# Altium PCB som_fpga.PcbDoc (part 1 of 2)
Units mm, origin at the board's own origin, x right, y up, seen from the top; angles counter-clockwise.
Board outline 60 x 50 mm, 4 copper layers (F.Cu, In1.Cu, In2.Cu, B.Cu); 88 components, 111 nets, 794 pads, 250 vias.
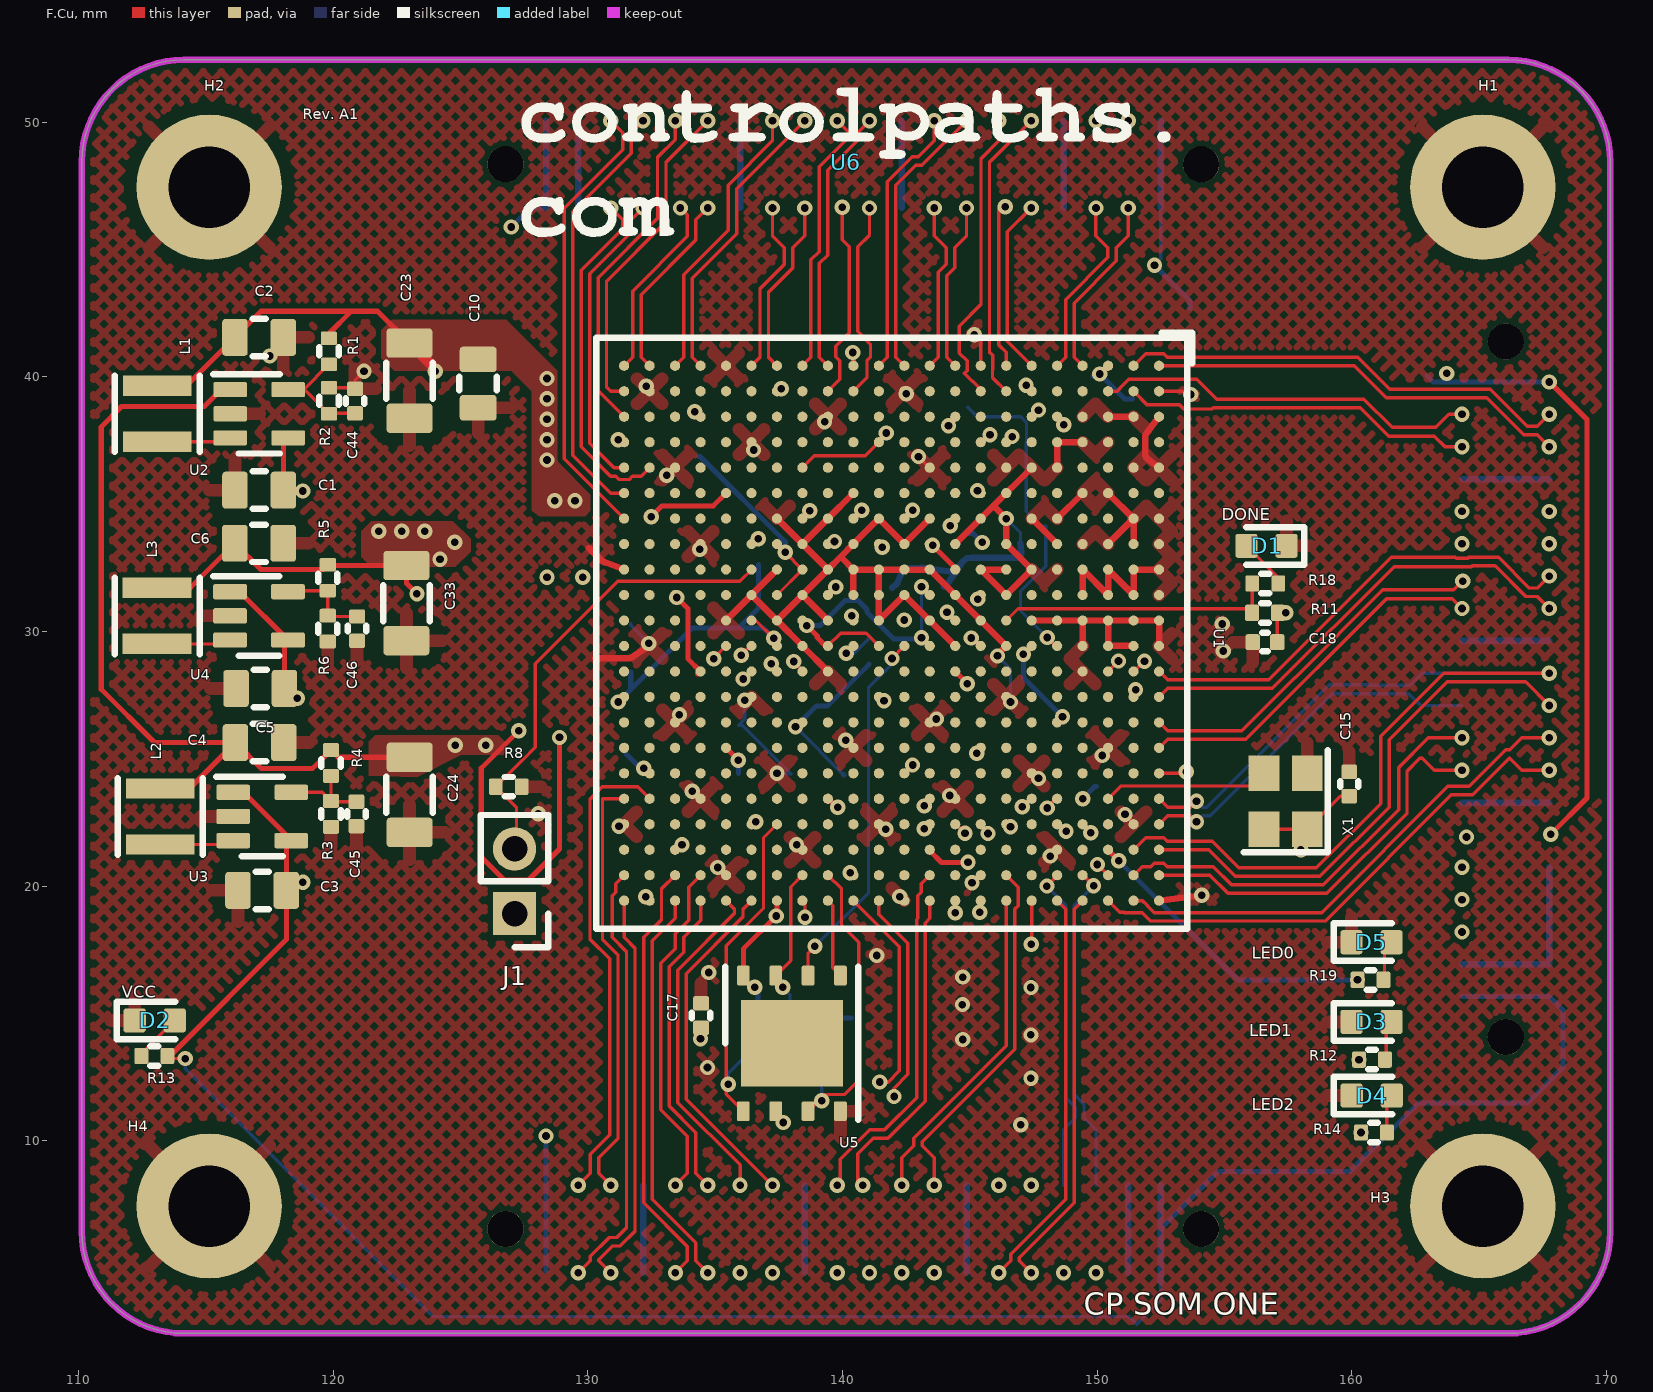
[diagram p0: F.Cu view]
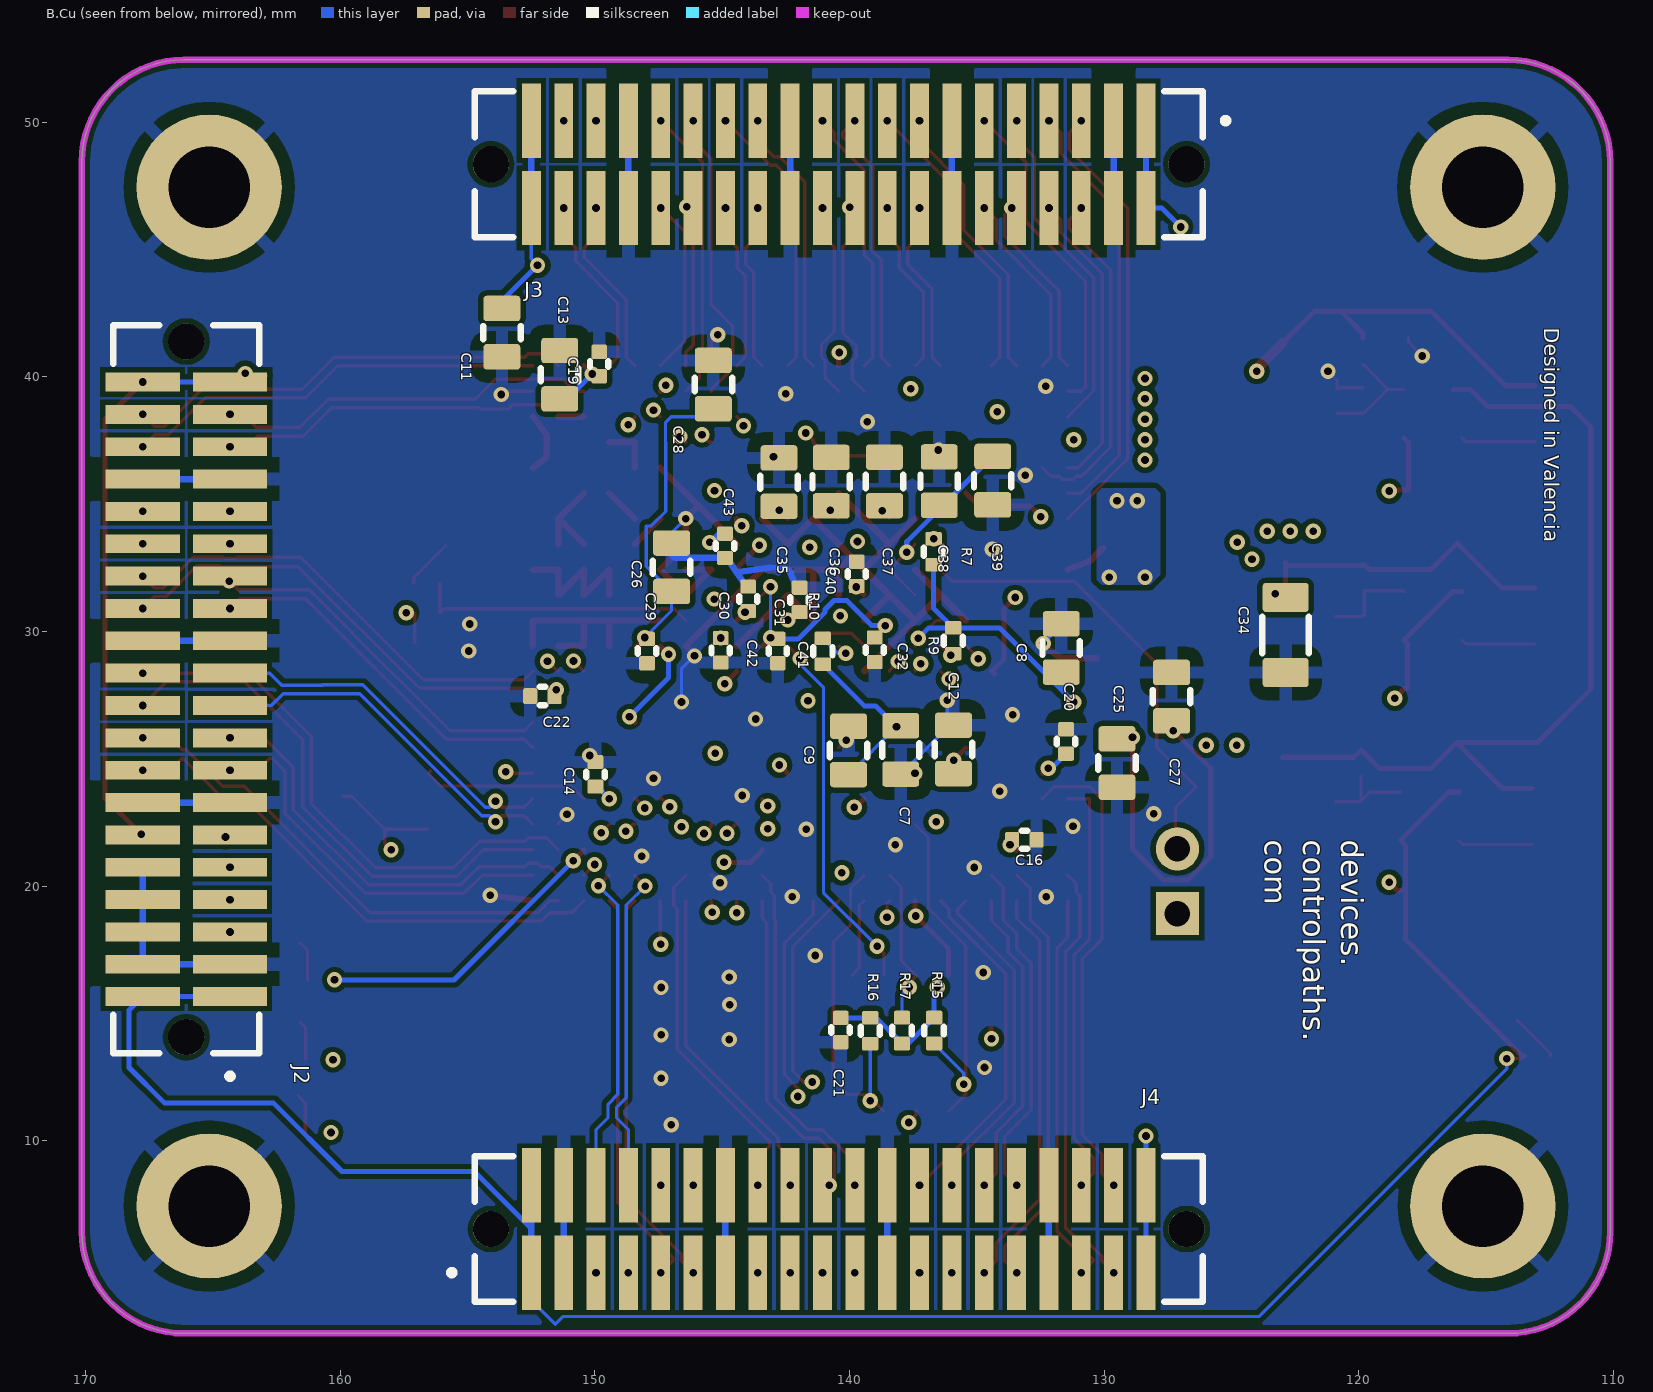
[diagram p1: B.Cu view, seen from below]
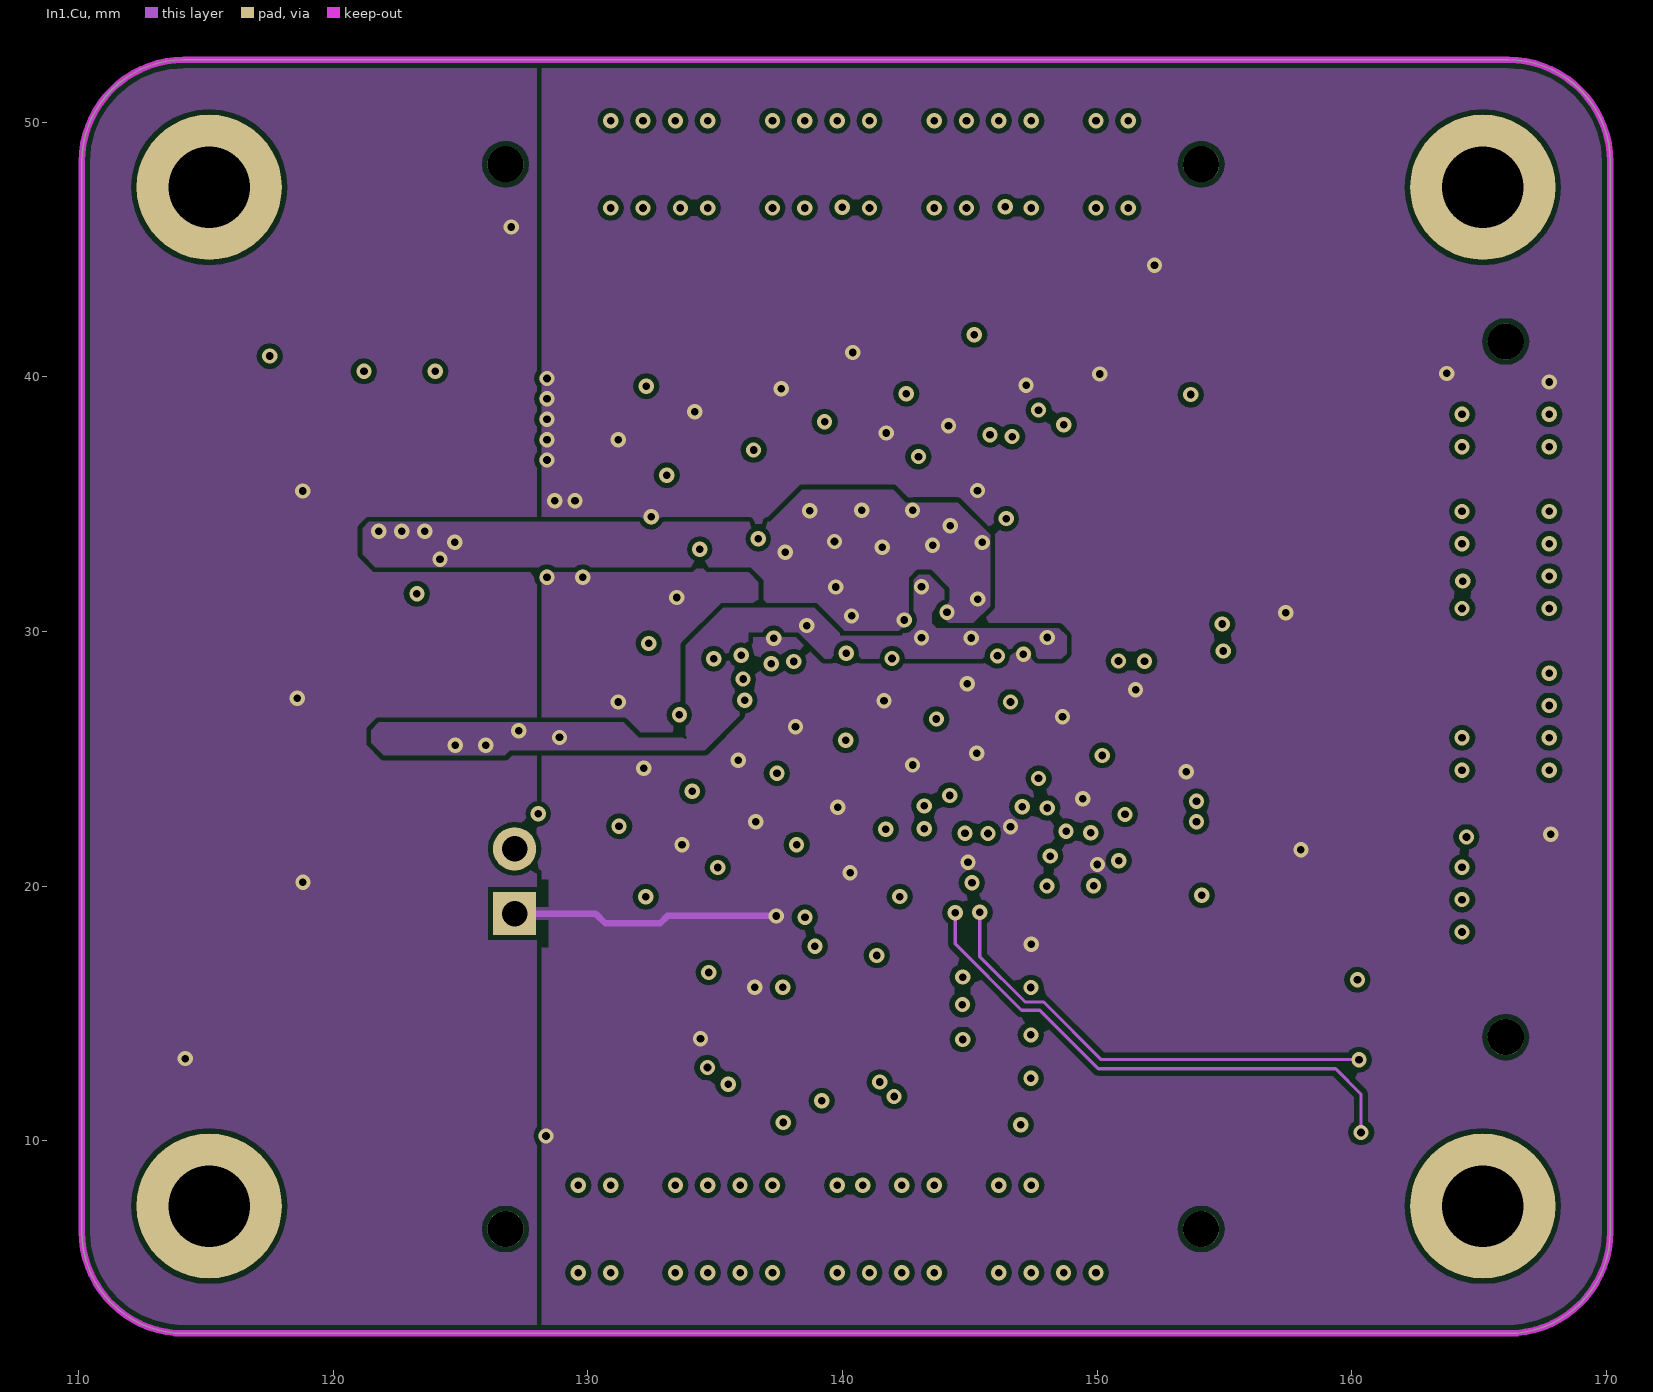
[diagram p2: In1.Cu]
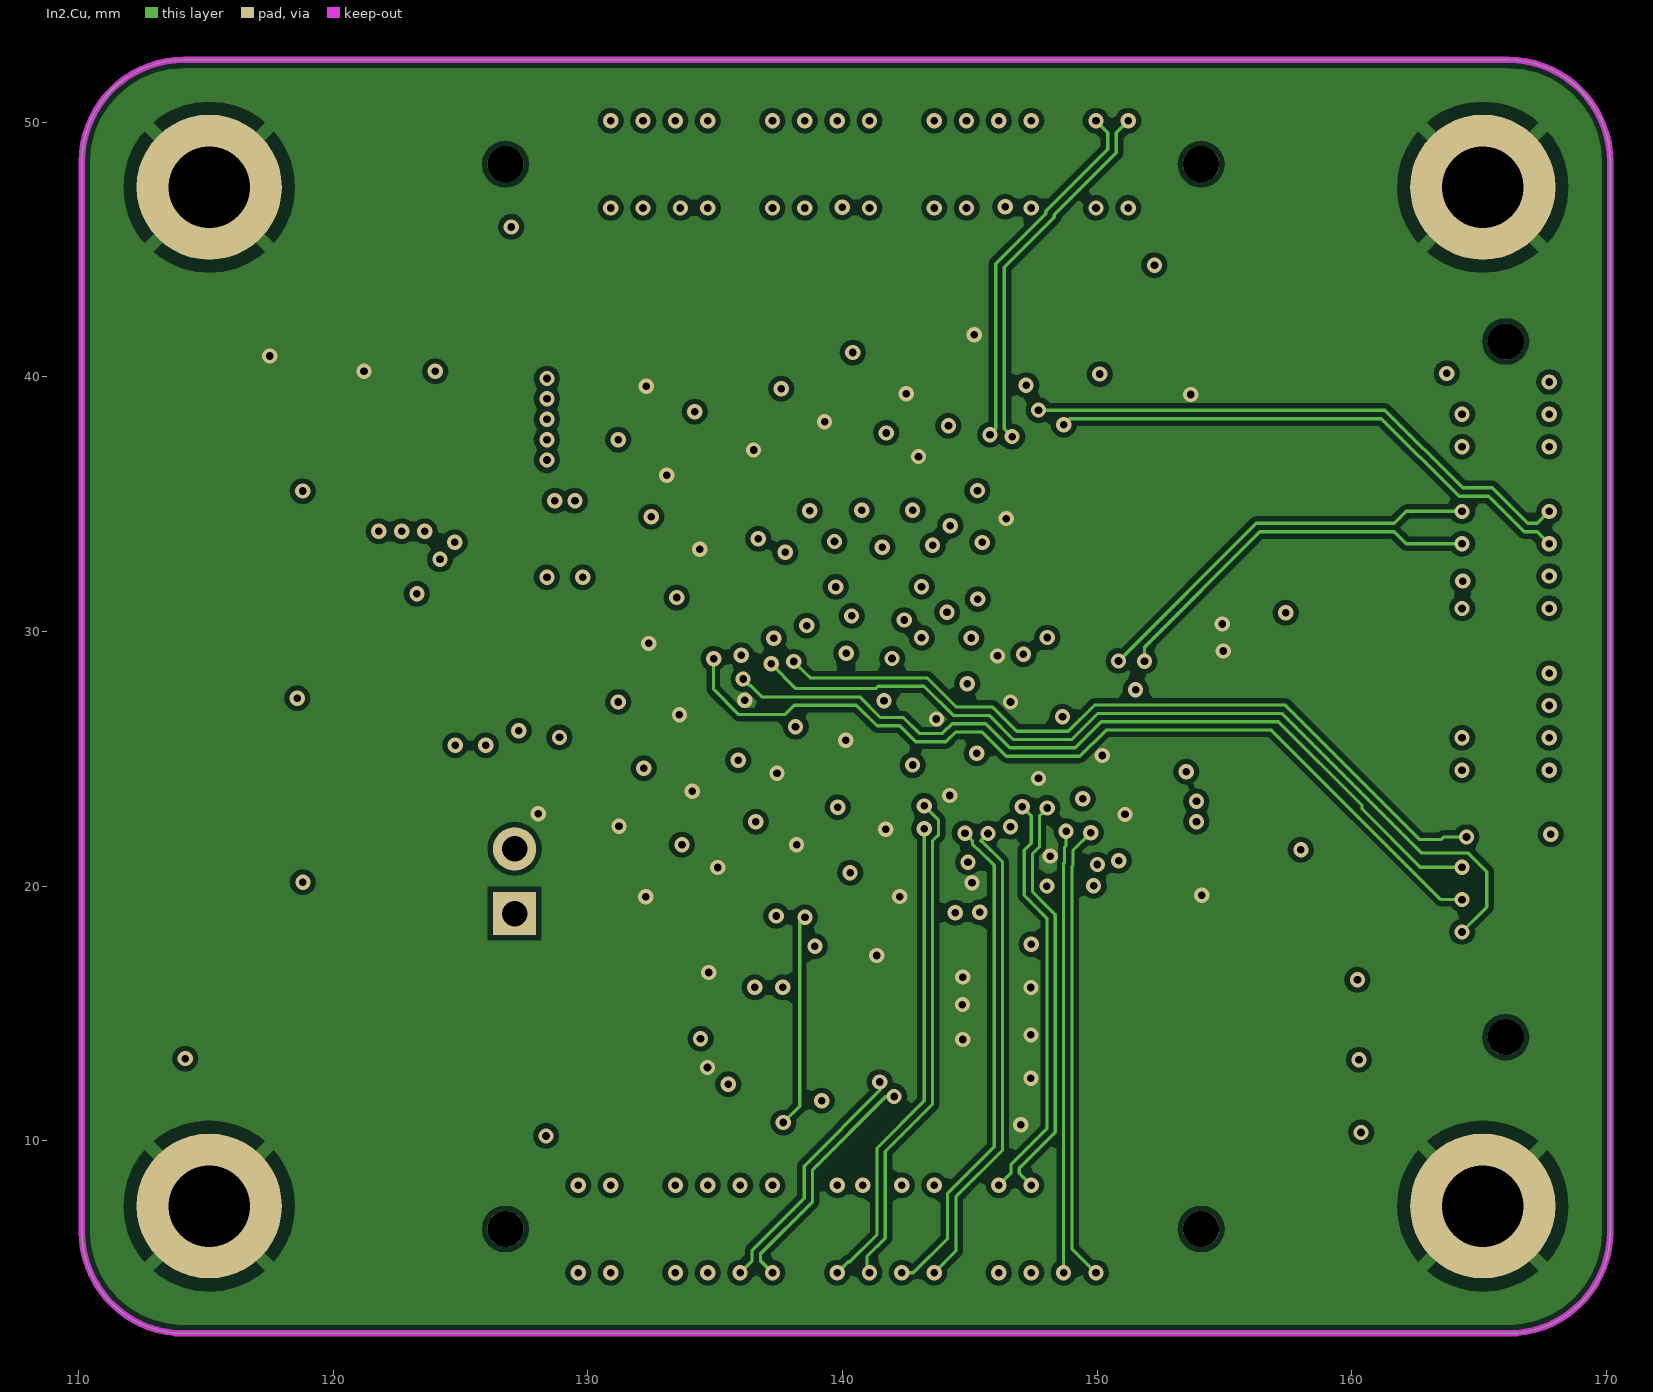
[diagram p3: In2.Cu]

## Layer stack, top to bottom
F.Mask: solder mask 0.0102, Solder Resist, Dk 3.5
F.Cu: signal copper 0.0356
Dielectric 1: dielectric 0.32, FR-4, Dk 4.8
In1.Cu: signal copper 0.0356
Dielectric2: dielectric 0.32, FR-4, Dk 4.8
In2.Cu: signal copper 0.0356
Dielectric3: dielectric 0.32, FR-4, Dk 4.8
B.Cu: signal copper 0.0356
B.Mask: solder mask 0.0102, Solder Resist, Dk 3.5

## Board outline
170.14,48.44 170.14,6.44 cw(c166.14,6.44) 166.14,2.44 114.14,2.44 cw(c114.14,6.44) 110.14,6.44 110.14,48.44 cw(c114.14,48.44) 166.14,52.44 cw(c166.14,48.44) 170.14,48.44

## Design rules (kind name [scope] priority, off if disabled: settings)
Clearance "Clearence 0.3_Polygon" [InNamedPolygon('In1.Cu-+3V3-1')] p1: gap=0.3 ignorepadtopadclearanceinfootprint=FALSE
Clearance "Clearence 0.2_Polygon" [InNamedPolygon('F.Cu-+1V8') OR InNamedPolygon('F.Cu-+3V3') OR InNamedPolygon('F.Cu-+1V0') OR InNamedPolygon('F.Cu-GND') OR InNamedPolygon('In1.Cu-+3V3') OR InNamedPolygon('In1.Cu-+1V8') OR InNamedPolygon('In1.Cu-+5V') OR InNamedPolygon('In1.Cu-+1V0') OR InNamedPolygon('In2.Cu-GND') OR InNamedPolygon('B.Cu-+3V3') OR InNamedPolygon('B.Cu-GND')] p2: gap=0.2 ignorepadtopadclearanceinfootprint=FALSE
HoleSize [All] p1: absolutevalues=TRUE maxlimit=3.6 minlimit=0.025 maxpercent=80.000 minpercent=20.000
MinimumSolderMaskSliver [All] p1: minsoldermaskwidth=0
PolygonConnect Polygon_B.Cu-GND_ConnectDirect [IsNamedPolygon('B.Cu-GND') vs IsVia] p1: connectstyle=Direct reliefconductorwidth=0.254 reliefentries=4 polygonreliefangle="90 Angle" airgapwidth=0.254
PolygonConnect Polygon_B.Cu-GND_ConnectRelief45 [IsNamedPolygon('B.Cu-GND') vs (IsThruPin or IsSMTPin) and (PadShape_AllLayers = 'Round')] p2: connectstyle=Relief reliefconductorwidth=0.5 reliefentries=4 polygonreliefangle="45 Angle" airgapwidth=0.5
PolygonConnect Polygon_B.Cu-GND_ConnectRelief90 [IsNamedPolygon('B.Cu-GND') vs (IsThruPin or IsSMTPin) and (PadShape_AllLayers <> 'Round')] p3: connectstyle=Relief reliefconductorwidth=0.5 reliefentries=4 polygonreliefangle="90 Angle" airgapwidth=0.5
PolygonConnect Polygon_B.Cu-+3V3_ConnectDirect [IsNamedPolygon('B.Cu-+3V3') vs IsVia] p4: connectstyle=Direct reliefconductorwidth=0.254 reliefentries=4 polygonreliefangle="90 Angle" airgapwidth=0.254
PolygonConnect Polygon_B.Cu-+3V3_ConnectRelief45 [IsNamedPolygon('B.Cu-+3V3') vs (IsThruPin or IsSMTPin) and (PadShape_AllLayers = 'Round')] p5: connectstyle=Relief reliefconductorwidth=0.5 reliefentries=4 polygonreliefangle="45 Angle" airgapwidth=0.5
PolygonConnect Polygon_B.Cu-+3V3_ConnectRelief90 [IsNamedPolygon('B.Cu-+3V3') vs (IsThruPin or IsSMTPin) and (PadShape_AllLayers <> 'Round')] p6: connectstyle=Relief reliefconductorwidth=0.5 reliefentries=4 polygonreliefangle="90 Angle" airgapwidth=0.5
PolygonConnect Polygon_In2.Cu-GND_ConnectDirect [IsNamedPolygon('In2.Cu-GND') vs IsVia] p7: connectstyle=Direct reliefconductorwidth=0.254 reliefentries=4 polygonreliefangle="90 Angle" airgapwidth=0.254
PolygonConnect Polygon_In2.Cu-GND_ConnectRelief45 [IsNamedPolygon('In2.Cu-GND') vs (IsThruPin or IsSMTPin) and (PadShape_AllLayers = 'Round')] p8: connectstyle=Relief reliefconductorwidth=0.5 reliefentries=4 polygonreliefangle="45 Angle" airgapwidth=0.5
PolygonConnect Polygon_In2.Cu-GND_ConnectRelief90 [IsNamedPolygon('In2.Cu-GND') vs (IsThruPin or IsSMTPin) and (PadShape_AllLayers <> 'Round')] p9: connectstyle=Relief reliefconductorwidth=0.5 reliefentries=4 polygonreliefangle="90 Angle" airgapwidth=0.5
PolygonConnect Polygon_In1.Cu-+1V0_ConnectDirect [IsNamedPolygon('In1.Cu-+1V0') vs IsVia] p10: connectstyle=Direct reliefconductorwidth=0.254 reliefentries=4 polygonreliefangle="90 Angle" airgapwidth=0.254
PolygonConnect Polygon_In1.Cu-+1V0_ConnectRelief45 [IsNamedPolygon('In1.Cu-+1V0') vs (IsThruPin or IsSMTPin) and (PadShape_AllLayers = 'Round')] p11: connectstyle=Relief reliefconductorwidth=0.5 reliefentries=4 polygonreliefangle="45 Angle" airgapwidth=0.5
PolygonConnect Polygon_In1.Cu-+1V0_ConnectRelief90 [IsNamedPolygon('In1.Cu-+1V0') vs (IsThruPin or IsSMTPin) and (PadShape_AllLayers <> 'Round')] p12: connectstyle=Relief reliefconductorwidth=0.5 reliefentries=4 polygonreliefangle="90 Angle" airgapwidth=0.5
PolygonConnect Polygon_In1.Cu-+5V_ConnectDirect [IsNamedPolygon('In1.Cu-+5V') vs IsVia] p13: connectstyle=Direct reliefconductorwidth=0.254 reliefentries=4 polygonreliefangle="90 Angle" airgapwidth=0.254
PolygonConnect Polygon_In1.Cu-+5V_ConnectRelief45 [IsNamedPolygon('In1.Cu-+5V') vs (IsThruPin or IsSMTPin) and (PadShape_AllLayers = 'Round')] p14: connectstyle=Relief reliefconductorwidth=0.5 reliefentries=4 polygonreliefangle="45 Angle" airgapwidth=0.5
PolygonConnect Polygon_In1.Cu-+5V_ConnectRelief90 [IsNamedPolygon('In1.Cu-+5V') vs (IsThruPin or IsSMTPin) and (PadShape_AllLayers <> 'Round')] p15: connectstyle=Relief reliefconductorwidth=0.5 reliefentries=4 polygonreliefangle="90 Angle" airgapwidth=0.5
PolygonConnect Polygon_In1.Cu-+3V3-1_ConnectDirect [IsNamedPolygon('In1.Cu-+3V3-1') vs IsVia] p16: connectstyle=Direct reliefconductorwidth=0.254 reliefentries=4 polygonreliefangle="90 Angle" airgapwidth=0.254
PolygonConnect Polygon_In1.Cu-+3V3-1_ConnectRelief45 [IsNamedPolygon('In1.Cu-+3V3-1') vs (IsThruPin or IsSMTPin) and (PadShape_AllLayers = 'Round')] p17: connectstyle=Relief reliefconductorwidth=0.5 reliefentries=4 polygonreliefangle="45 Angle" airgapwidth=0.5
PolygonConnect Polygon_In1.Cu-+3V3-1_ConnectRelief90 [IsNamedPolygon('In1.Cu-+3V3-1') vs (IsThruPin or IsSMTPin) and (PadShape_AllLayers <> 'Round')] p18: connectstyle=Relief reliefconductorwidth=0.5 reliefentries=4 polygonreliefangle="90 Angle" airgapwidth=0.5
PolygonConnect Polygon_In1.Cu-+1V8_ConnectDirect [IsNamedPolygon('In1.Cu-+1V8') vs IsVia] p19: connectstyle=Direct reliefconductorwidth=0.254 reliefentries=4 polygonreliefangle="90 Angle" airgapwidth=0.254
PolygonConnect Polygon_In1.Cu-+1V8_ConnectRelief45 [IsNamedPolygon('In1.Cu-+1V8') vs (IsThruPin or IsSMTPin) and (PadShape_AllLayers = 'Round')] p20: connectstyle=Relief reliefconductorwidth=0.5 reliefentries=4 polygonreliefangle="45 Angle" airgapwidth=0.5
PolygonConnect Polygon_In1.Cu-+1V8_ConnectRelief90 [IsNamedPolygon('In1.Cu-+1V8') vs (IsThruPin or IsSMTPin) and (PadShape_AllLayers <> 'Round')] p21: connectstyle=Relief reliefconductorwidth=0.5 reliefentries=4 polygonreliefangle="90 Angle" airgapwidth=0.5
PolygonConnect Polygon_In1.Cu-+3V3_ConnectDirect [IsNamedPolygon('In1.Cu-+3V3') vs IsVia] p22: connectstyle=Direct reliefconductorwidth=0.254 reliefentries=4 polygonreliefangle="90 Angle" airgapwidth=0.254
PolygonConnect Polygon_In1.Cu-+3V3_ConnectRelief45 [IsNamedPolygon('In1.Cu-+3V3') vs (IsThruPin or IsSMTPin) and (PadShape_AllLayers = 'Round')] p23: connectstyle=Relief reliefconductorwidth=0.5 reliefentries=4 polygonreliefangle="45 Angle" airgapwidth=0.5
PolygonConnect Polygon_In1.Cu-+3V3_ConnectRelief90 [IsNamedPolygon('In1.Cu-+3V3') vs (IsThruPin or IsSMTPin) and (PadShape_AllLayers <> 'Round')] p24: connectstyle=Relief reliefconductorwidth=0.5 reliefentries=4 polygonreliefangle="90 Angle" airgapwidth=0.5
PolygonConnect Polygon_F.Cu-GND_ConnectDirect [IsNamedPolygon('F.Cu-GND') vs IsVia] p25: connectstyle=Direct reliefconductorwidth=0.254 reliefentries=4 polygonreliefangle="90 Angle" airgapwidth=0.254
PolygonConnect Polygon_F.Cu-GND_ConnectRelief45 [IsNamedPolygon('F.Cu-GND') vs (IsThruPin or IsSMTPin) and (PadShape_AllLayers = 'Round')] p26: connectstyle=Relief reliefconductorwidth=0.5 reliefentries=4 polygonreliefangle="45 Angle" airgapwidth=0.5
PolygonConnect Polygon_F.Cu-GND_ConnectRelief90 [IsNamedPolygon('F.Cu-GND') vs (IsThruPin or IsSMTPin) and (PadShape_AllLayers <> 'Round')] p27: connectstyle=Relief reliefconductorwidth=0.5 reliefentries=4 polygonreliefangle="90 Angle" airgapwidth=0.5
PolygonConnect Polygon_F.Cu-+1V0_ConnectDirect [IsNamedPolygon('F.Cu-+1V0') vs IsVia] p28: connectstyle=Direct reliefconductorwidth=0.254 reliefentries=4 polygonreliefangle="90 Angle" airgapwidth=0.254
PolygonConnect Polygon_F.Cu-+1V0_ConnectRelief45 [IsNamedPolygon('F.Cu-+1V0') vs (IsThruPin or IsSMTPin) and (PadShape_AllLayers = 'Round')] p29: connectstyle=Relief reliefconductorwidth=0.5 reliefentries=4 polygonreliefangle="45 Angle" airgapwidth=0.5
PolygonConnect Polygon_F.Cu-+1V0_ConnectRelief90 [IsNamedPolygon('F.Cu-+1V0') vs (IsThruPin or IsSMTPin) and (PadShape_AllLayers <> 'Round')] p30: connectstyle=Relief reliefconductorwidth=0.5 reliefentries=4 polygonreliefangle="90 Angle" airgapwidth=0.5
PolygonConnect Polygon_F.Cu-+3V3_ConnectDirect [IsNamedPolygon('F.Cu-+3V3') vs IsVia] p31: connectstyle=Direct reliefconductorwidth=0.254 reliefentries=4 polygonreliefangle="90 Angle" airgapwidth=0.254
PolygonConnect Polygon_F.Cu-+3V3_ConnectRelief45 [IsNamedPolygon('F.Cu-+3V3') vs (IsThruPin or IsSMTPin) and (PadShape_AllLayers = 'Round')] p32: connectstyle=Relief reliefconductorwidth=0.5 reliefentries=4 polygonreliefangle="45 Angle" airgapwidth=0.5
PolygonConnect Polygon_F.Cu-+3V3_ConnectRelief90 [IsNamedPolygon('F.Cu-+3V3') vs (IsThruPin or IsSMTPin) and (PadShape_AllLayers <> 'Round')] p33: connectstyle=Relief reliefconductorwidth=0.5 reliefentries=4 polygonreliefangle="90 Angle" airgapwidth=0.5
PolygonConnect Polygon_F.Cu-+1V8_ConnectDirect [IsNamedPolygon('F.Cu-+1V8') vs IsVia] p34: connectstyle=Direct reliefconductorwidth=0.254 reliefentries=4 polygonreliefangle="90 Angle" airgapwidth=0.254
PolygonConnect Polygon_F.Cu-+1V8_ConnectRelief45 [IsNamedPolygon('F.Cu-+1V8') vs (IsThruPin or IsSMTPin) and (PadShape_AllLayers = 'Round')] p35: connectstyle=Relief reliefconductorwidth=0.5 reliefentries=4 polygonreliefangle="45 Angle" airgapwidth=0.5
PolygonConnect Polygon_F.Cu-+1V8_ConnectRelief90 [IsNamedPolygon('F.Cu-+1V8') vs (IsThruPin or IsSMTPin) and (PadShape_AllLayers <> 'Round')] p36: connectstyle=Relief reliefconductorwidth=0.5 reliefentries=4 polygonreliefangle="90 Angle" airgapwidth=0.5
RoutingVias [All] p1: holewidth=0.711 width=1.27 viastyle="Through Hole" minholewidth=0.711 minwidth=1.27 maxholewidth=0.711 maxwidth=1.27
SilkToSilkClearance [All] p1: silktosilkclearance=0
SilkToSolderMaskClearance [IsPad] p1: minsilkscreentomaskgap=0 clearancetoexposedcopper=TRUE
SolderMaskExpansion [All] p1: expansion=0.102 istentingtop=FALSE
SupplyNets "Schematic Supply Nets_4" [InNet('GND')] p1: voltage=0.000
SupplyNets "Schematic Supply Nets_3" [InNet('+5V')] p2: voltage=0.000
SupplyNets "Schematic Supply Nets_2" [InNet('+3V3')] p3: voltage=0.000
SupplyNets "Schematic Supply Nets_1" [InNet('+1V8')] p4: voltage=0.000
SupplyNets "Schematic Supply Nets" [InNet('+1V0')] p5: voltage=0.000
Width [All] p1: maxlimit=2.54 minlimit=0.102 preferedwidth=0.254
26 further rules are at their usual default settings.

## Classes and differential pairs
component class supply: C1 C2 C3 C4 C5 C6 C7 C8 C9 C10 C11 C12 C13 C14 C15 C16 C17 C18 C19 C20 C21 C22 C23 C24 C25 C26 C27 C28 C29 C30 C31 C32 C33 C34 C35 C36 C37 C38 C39 C40 C41 C42 C43 C44 C45 C46 D2 L1 L2 L3 R1 R2 R3 R4 R5 R6 R13 U2 U3 U4
component class som_fpga: H1 H2 H3 H4
component class FPGA_bank15_16: X1
component class FPGA_bank13_14: R15 R16 R17 U1 U5
component class FPGA_bank0_vss: D1 J1 R7 R8 R9 R10 R11 R18
component class connectors: D3 D4 D5 J2 J3 J4 R12 R14 R19

## Components (designator, comment, footprint, x,y, rotation, side; value= is the part's Value field where it differs from the comment)
C1 "4u7" C_0805_2012Metric#1 117.102,35.546 r180 top
C2 "10u" C_0805_2012Metric#1 117.102,41.546 r0 top
C3 "4u7" C_0805_2012Metric#1 117.219,19.836 r180 top
C4 "10u" C_0805_2012Metric#1 117.119,25.636 r0 top
C5 "4u7" C_0805_2012Metric#1 117.144,27.761 r180 top
C6 "10u" C_0805_2012Metric#1 117.094,33.461 r0 top
C7 "4u7" C_0805_2012Metric#2 137.99,25.35 r90 bottom
C8 "4u7" C_0805_2012Metric#2 131.69,29.35 r270 bottom
C9 "4u7" C_0805_2012Metric#2 140.04,25.33 r270 bottom
C10 "4u7" C_0805_2012Metric#1 125.7,39.73 r270 top
C11 "4u7" C_0805_2012Metric#2 153.65,41.73 r90 bottom
C12 "4u7" C_0805_2012Metric#2 135.92,25.37 r270 bottom
C13 "4u7" C_0805_2012Metric#2 151.38,40.08 r270 bottom
C14 "0.47u" C_0402_1005Metric#1 149.98,24.39 r270 bottom
C15 "0.47u" C_0402_1005Metric#2 159.9,24.01 r90 top
C16 "0.47u" C_0402_1005Metric#1 133.14,21.82 r0 bottom
C17 "0.47u" C_0402_1005Metric#2 134.45,14.92 r90 top
C18 "0.47u" C_0402_1005Metric#2 156.59,29.58 r180 top
C19 "0.47u" C_0402_1005Metric#1 149.83,40.5 r270 bottom
C20 "0.47u" C_0402_1005Metric#1 131.5,25.68 r270 bottom
C21 "0.47u" C_0402_1005Metric#1 140.35,14.35 r90 bottom
C22 "0.47u" C_0402_1005Metric#1 152.06,27.46 r180 bottom
C23 "47u" C_1206_3216Metric#1 123.001,39.846 r270 top
C24 "47u" C_1206_3216Metric#1 123.007,23.586 r270 top
C25 "4u7" C_0805_2012Metric#2 129.5,24.83 r90 bottom
C26 "4u7" C_0805_2012Metric#2 146.99,32.52 r270 bottom
C27 "4u7" C_0805_2012Metric#2 127.36,27.44 r270 bottom
C28 "4u7" C_0805_2012Metric#2 145.35,39.69 r270 bottom
C29 "0.47u" C_0402_1005Metric#1 147.95,29.23 r90 bottom
C30 "0.47u" C_0402_1005Metric#1 145.06,29.26 r90 bottom
C31 "0.47u" C_0402_1005Metric#1 142.82,29.23 r90 bottom
C32 "0.47u" C_0402_1005Metric#1 139.01,29.28 r90 bottom
C33 "100u" C_1206_3216Metric#1 122.881,31.111 r270 top
C34 "100u" C_1206_3216Metric#2 122.88,29.86 r90 bottom
C35 "4u7" C_0805_2012Metric#2 142.77,35.86 r270 bottom
C36 "4u7" C_0805_2012Metric#2 140.72,35.88 r270 bottom
C37 "4u7" C_0805_2012Metric#2 138.63,35.89 r270 bottom
C38 "4u7" C_0805_2012Metric#2 136.48,35.9 r270 bottom
C39 "4u7" C_0805_2012Metric#2 134.38,35.92 r90 bottom
C40 "0.47u" C_0402_1005Metric#1 139.72,32.26 r270 bottom
C41 "0.47u" C_0402_1005Metric#1 141.96,31.24 r270 bottom
C42 "0.47u" C_0402_1005Metric#1 143.98,31.28 r270 bottom
C43 "0.47u" C_0402_1005Metric#1 144.89,33.36 r90 bottom
C44 "0.47u" C_0402_1005Metric#2 120.864,39.046 r90 top
C45 "0.47u" C_0402_1005Metric#2 120.919,22.836 r270 top
C46 "0.47u" C_0402_1005Metric#2 120.944,30.111 r270 top
D1 "DONE" LED_0603_1608Metric 156.65,33.36 r180 top
D2 "VCC" LED_0603_1608Metric 113,14.73 r0 top
D3 "USER_LED" LED_0603_1608Metric 160.77,14.67 r0 top
D4 "USER_LED" LED_0603_1608Metric 160.78,11.78 r0 top
D5 "USER_LED" LED_0603_1608Metric 160.77,17.8 r0 top
H1 "MountingHole_Pad" MountingHole_3.2mm_M3_ISO7380_Pad 165.14,47.44 r0 top
H2 "MountingHole_Pad" MountingHole_3.2mm_M3_ISO7380_Pad 115.14,47.44 r0 top
H3 "MountingHole_Pad" MountingHole_3.2mm_M3_ISO7380_Pad 165.14,7.44 r0 top
H4 "MountingHole_Pad" MountingHole_3.2mm_M3_ISO7380_Pad 115.14,7.44 r0 top
J1 "Conn_01x02_Pin" PinHeader_1x02_P2.54mm_Vertical 127.127,18.923 r180 top
J2 "Conn_02x20_Odd_Even" SAMTEC_TFM-120-02-S-D-A 166.04,27.728 r270 bottom
J3 "Conn_02x20_Odd_Even" SAMTEC_TFM-120-02-S-D-A 140.427,48.34 r180 bottom
J4 "Conn_02x20_Odd_Even" SAMTEC_TFM-120-02-S-D-A 140.427,6.54 r0 bottom
L1 "2u2" IND_LQH3NPN2R2MJRL 113.102,38.546 r90 top
L2 "2u2" IND_LQH3NPN2R2MJRL 113.219,22.736 r90 top
L3 "2u2" IND_LQH3NPN2R2MJRL 113.094,30.611 r90 top
R1 "100k" R_0402_1005Metric#1 119.839,40.996 r270 top
R2 "22k" R_0402_1005Metric#1 119.839,39.056 r90 top
R3 "120k" R_0402_1005Metric#1 119.919,22.836 r270 top
R4 "240k" R_0402_1005Metric#1 119.919,24.836 r270 top
R5 "22k" R_0402_1005Metric#1 119.794,32.111 r270 top
R6 "33k" R_0402_1005Metric#1 119.794,30.111 r270 top
R7 "4k7" R_0402_1005Metric#2 136.7,33.13 r90 bottom
R8 "4k7" R_0402_1005Metric#1 126.9,23.905 r0 top
R9 "4k7" R_0402_1005Metric#2 135.93,29.63 r270 bottom
R10 "4k7" R_0402_1005Metric#2 141.05,29.22 r90 bottom
R11 "330" R_0402_1005Metric#1 156.59,30.73 r0 top
R12 "10k" R_0402_1005Metric#1 160.79,13.19 r0 top
R13 "10k" R_0402_1005Metric#1 112.988,13.33 r180 top
R14 "10k" R_0402_1005Metric#1 160.87,10.33 r0 top
R15 "4k7" R_0402_1005Metric#2 136.68,14.33 r90 bottom
R16 "4k7" R_0402_1005Metric#2 139.19,14.32 r90 bottom
R17 "4k7" R_0402_1005Metric#2 137.94,14.33 r270 bottom
R18 "100" R_0402_1005Metric#1 156.6,31.88 r180 top
R19 "10k" R_0402_1005Metric#1 160.73,16.32 r0 top
U1 "" FB-BGA-484_23.0x23.0mm_Layout22x22_P1.0mm 141.93,29.93 r270 top value=XC7A35T-FGG484
U2 "TLV62565DBVR" SOT-23-5 117.102,38.546 r0 top
U3 "TLV62565DBVR" SOT-23-5 117.219,22.736 r0 top
U4 "TLV62565DBVR" SOT-23-5 117.094,30.611 r0 top
U5 "MX25L12833F" WSON-8-1EP_6x5mm_P1.27mm_EP3.4x4mm 138.015,13.828 r90 top
U6 "cp_logo25mm" logo25mm 140.125,48.43 r0 top
X1 "SG-8018CE" Crystal_SMD_3225-4Pin_3.2x2.5mm 157.4,23.33 r90 top

## Footprints (in the part's own frame and the unit in brackets; to place one, negate y for a bottom-side part, rotate by r counter-clockwise, add the part's x,y. Pads: shape width x height; smd on the part's side, far side on the other; paste and mask are expansions set on the pad)
C_0402_1005Metric#1 [mm]
  rrect25% 0.56x0.62 smd mask+0: 1(0.48,0) 2(-0.48,0)
  silkscreen extent -0.11,-0.36 0.11,0.36
C_0402_1005Metric#2 [mm]
  rrect25% 0.56x0.62 smd mask+0: 1(-0.48,0) 2(0.48,0)
  silkscreen extent -0.11,-0.36 0.11,0.36
C_0805_2012Metric#1 [mm]
  rrect25% 1x1.45 smd mask+0: 1(-0.95,0) 2(0.95,0)
  silkscreen extent -0.26,-0.73 0.26,0.73
C_0805_2012Metric#2 [mm]
  rrect25% 1x1.45 smd mask+0: 1(0.95,0) 2(-0.95,0)
  silkscreen extent -0.26,-0.73 0.26,0.73
C_1206_3216Metric#1 [mm]
  rrect22% 1.15x1.8 smd mask+0: 1(-1.475,0) 2(1.475,0)
  silkscreen extent -0.71,-0.91 0.71,0.91
C_1206_3216Metric#2 [mm]
  rrect22% 1.15x1.8 smd mask+0: 1(1.475,0) 2(-1.475,0)
  silkscreen extent -0.71,-0.91 0.71,0.91
Crystal_SMD_3225-4Pin_3.2x2.5mm [mm]
  rect 1.4x1.2 smd mask+0: 1(-1.1,-0.85) 2(1.1,-0.85) 3(1.1,0.85) 4(-1.1,0.85)
  silkscreen extent -2,-1.65 2,1.65
FB-BGA-484_23.0x23.0mm_Layout22x22_P1.0mm [mm]
  round 0.4 smd mask+0: A1(-10.5,10.5) A2(-9.5,10.5) A3(-8.5,10.5) A4(-7.5,10.5) A5(-6.5,10.5) A6(-5.5,10.5) A7(-4.5,10.5) A8(-3.5,10.5) A9(-2.5,10.5) A10(-1.5,10.5) A11(-0.5,10.5) A12(0.5,10.5) A13(1.5,10.5) A14(2.5,10.5) A15(3.5,10.5) A16(4.5,10.5) A17(5.5,10.5) A18(6.5,10.5) A19(7.5,10.5) A20(8.5,10.5) A21(9.5,10.5) A22(10.5,10.5) AA1(-10.5,-9.5) AA2(-9.5,-9.5) AA3(-8.5,-9.5) AA4(-7.5,-9.5) AA5(-6.5,-9.5) AA6(-5.5,-9.5) AA7(-4.5,-9.5) AA8(-3.5,-9.5) AA9(-2.5,-9.5) AA10(-1.5,-9.5) AA11(-0.5,-9.5) AA12(0.5,-9.5) AA13(1.5,-9.5) AA14(2.5,-9.5) AA15(3.5,-9.5) AA16(4.5,-9.5) AA17(5.5,-9.5) AA18(6.5,-9.5) AA19(7.5,-9.5) AA20(8.5,-9.5) AA21(9.5,-9.5) AA22(10.5,-9.5) AB1(-10.5,-10.5) AB2(-9.5,-10.5) AB3(-8.5,-10.5) AB4(-7.5,-10.5) AB5(-6.5,-10.5) AB6(-5.5,-10.5) AB7(-4.5,-10.5) AB8(-3.5,-10.5) AB9(-2.5,-10.5) AB10(-1.5,-10.5) AB11(-0.5,-10.5) AB12(0.5,-10.5) AB13(1.5,-10.5) AB14(2.5,-10.5) AB15(3.5,-10.5) AB16(4.5,-10.5) AB17(5.5,-10.5) AB18(6.5,-10.5) AB19(7.5,-10.5) AB20(8.5,-10.5) AB21(9.5,-10.5) AB22(10.5,-10.5) B1(-10.5,9.5) B2(-9.5,9.5) B3(-8.5,9.5) B4(-7.5,9.5) B5(-6.5,9.5) B6(-5.5,9.5) B7(-4.5,9.5) B8(-3.5,9.5) B9(-2.5,9.5) B10(-1.5,9.5) B11(-0.5,9.5) B12(0.5,9.5) B13(1.5,9.5) B14(2.5,9.5) B15(3.5,9.5) B16(4.5,9.5) B17(5.5,9.5) B18(6.5,9.5) B19(7.5,9.5) B20(8.5,9.5) B21(9.5,9.5) B22(10.5,9.5) C1(-10.5,8.5) C2(-9.5,8.5) C3(-8.5,8.5) C4(-7.5,8.5) C5(-6.5,8.5) C6(-5.5,8.5) C7(-4.5,8.5) C8(-3.5,8.5) C9(-2.5,8.5) C10(-1.5,8.5) C11(-0.5,8.5) C12(0.5,8.5) C13(1.5,8.5) C14(2.5,8.5) C15(3.5,8.5) C16(4.5,8.5) C17(5.5,8.5) C18(6.5,8.5) C19(7.5,8.5) C20(8.5,8.5) C21(9.5,8.5) C22(10.5,8.5) D1(-10.5,7.5) D2(-9.5,7.5) D3(-8.5,7.5) D4(-7.5,7.5) D5(-6.5,7.5) D6(-5.5,7.5) D7(-4.5,7.5) D8(-3.5,7.5) D9(-2.5,7.5) D10(-1.5,7.5) D11(-0.5,7.5) D12(0.5,7.5) D13(1.5,7.5) D14(2.5,7.5) D15(3.5,7.5) D16(4.5,7.5) D17(5.5,7.5) D18(6.5,7.5) D19(7.5,7.5) D20(8.5,7.5) D21(9.5,7.5) D22(10.5,7.5) E1(-10.5,6.5) E2(-9.5,6.5) E3(-8.5,6.5) E4(-7.5,6.5) E5(-6.5,6.5) E6(-5.5,6.5) E7(-4.5,6.5) E8(-3.5,6.5) E9(-2.5,6.5) E10(-1.5,6.5) E11(-0.5,6.5) E12(0.5,6.5) E13(1.5,6.5) E14(2.5,6.5) E15(3.5,6.5) E16(4.5,6.5) E17(5.5,6.5) E18(6.5,6.5) E19(7.5,6.5) E20(8.5,6.5) E21(9.5,6.5) E22(10.5,6.5) F1(-10.5,5.5) F2(-9.5,5.5) F3(-8.5,5.5) F4(-7.5,5.5) F5(-6.5,5.5) F6(-5.5,5.5) F7(-4.5,5.5) F8(-3.5,5.5) F9(-2.5,5.5) F10(-1.5,5.5) F11(-0.5,5.5) F12(0.5,5.5) F13(1.5,5.5) F14(2.5,5.5) F15(3.5,5.5) F16(4.5,5.5) F17(5.5,5.5) F18(6.5,5.5) F19(7.5,5.5) F20(8.5,5.5) F21(9.5,5.5) F22(10.5,5.5) G1(-10.5,4.5) G2(-9.5,4.5) G3(-8.5,4.5) G4(-7.5,4.5) G5(-6.5,4.5) G6(-5.5,4.5) G7(-4.5,4.5) G8(-3.5,4.5) G9(-2.5,4.5) G10(-1.5,4.5) G11(-0.5,4.5) G12(0.5,4.5) G13(1.5,4.5) G14(2.5,4.5) G15(3.5,4.5) G16(4.5,4.5) G17(5.5,4.5) G18(6.5,4.5) G19(7.5,4.5) G20(8.5,4.5) G21(9.5,4.5) G22(10.5,4.5) H1(-10.5,3.5) H2(-9.5,3.5) H3(-8.5,3.5) H4(-7.5,3.5) H5(-6.5,3.5) H6(-5.5,3.5) H7(-4.5,3.5) H8(-3.5,3.5) H9(-2.5,3.5) H10(-1.5,3.5) H11(-0.5,3.5) H12(0.5,3.5) H13(1.5,3.5) H14(2.5,3.5) H15(3.5,3.5) H16(4.5,3.5) H17(5.5,3.5) H18(6.5,3.5) H19(7.5,3.5) H20(8.5,3.5) H21(9.5,3.5) H22(10.5,3.5) J1(-10.5,2.5) J2(-9.5,2.5) J3(-8.5,2.5) J4(-7.5,2.5) J5(-6.5,2.5) J6(-5.5,2.5) J7(-4.5,2.5) J8(-3.5,2.5) J9(-2.5,2.5) J10(-1.5,2.5) J11(-0.5,2.5) J12(0.5,2.5) J13(1.5,2.5) J14(2.5,2.5) J15(3.5,2.5) J16(4.5,2.5) J17(5.5,2.5) J18(6.5,2.5) J19(7.5,2.5) J20(8.5,2.5) J21(9.5,2.5) J22(10.5,2.5) K1(-10.5,1.5) K2(-9.5,1.5) K3(-8.5,1.5) K4(-7.5,1.5) K5(-6.5,1.5) K6(-5.5,1.5) K7(-4.5,1.5) K8(-3.5,1.5) K9(-2.5,1.5) K10(-1.5,1.5) K11(-0.5,1.5) K12(0.5,1.5) K13(1.5,1.5) K14(2.5,1.5) K15(3.5,1.5) K16(4.5,1.5) K17(5.5,1.5) K18(6.5,1.5) K19(7.5,1.5) K20(8.5,1.5) K21(9.5,1.5) K22(10.5,1.5) L1(-10.5,0.5) L2(-9.5,0.5) L3(-8.5,0.5) L4(-7.5,0.5) L5(-6.5,0.5) L6(-5.5,0.5) L7(-4.5,0.5) L8(-3.5,0.5) L9(-2.5,0.5) L10(-1.5,0.5) L11(-0.5,0.5) L12(0.5,0.5) L13(1.5,0.5) L14(2.5,0.5) L15(3.5,0.5) L16(4.5,0.5) L17(5.5,0.5) L18(6.5,0.5) L19(7.5,0.5) L20(8.5,0.5) L21(9.5,0.5) L22(10.5,0.5) M1(-10.5,-0.5) M2(-9.5,-0.5) M3(-8.5,-0.5) M4(-7.5,-0.5) M5(-6.5,-0.5) M6(-5.5,-0.5) M7(-4.5,-0.5) M8(-3.5,-0.5) M9(-2.5,-0.5) M10(-1.5,-0.5) M11(-0.5,-0.5) M12(0.5,-0.5) M13(1.5,-0.5) M14(2.5,-0.5) M15(3.5,-0.5) M16(4.5,-0.5) M17(5.5,-0.5) M18(6.5,-0.5) M19(7.5,-0.5) M20(8.5,-0.5) M21(9.5,-0.5) M22(10.5,-0.5) N1(-10.5,-1.5) N2(-9.5,-1.5) N3(-8.5,-1.5) N4(-7.5,-1.5) N5(-6.5,-1.5) N6(-5.5,-1.5) N7(-4.5,-1.5) N8(-3.5,-1.5) N9(-2.5,-1.5) N10(-1.5,-1.5) N11(-0.5,-1.5) N12(0.5,-1.5) N13(1.5,-1.5) N14(2.5,-1.5) N15(3.5,-1.5) N16(4.5,-1.5) N17(5.5,-1.5) N18(6.5,-1.5) N19(7.5,-1.5) N20(8.5,-1.5) N21(9.5,-1.5) N22(10.5,-1.5) P1(-10.5,-2.5) P2(-9.5,-2.5) P3(-8.5,-2.5) P4(-7.5,-2.5) P5(-6.5,-2.5) P6(-5.5,-2.5) P7(-4.5,-2.5) P8(-3.5,-2.5) P9(-2.5,-2.5) P10(-1.5,-2.5) P11(-0.5,-2.5) P12(0.5,-2.5) P13(1.5,-2.5) P14(2.5,-2.5) P15(3.5,-2.5) P16(4.5,-2.5) P17(5.5,-2.5) P18(6.5,-2.5) P19(7.5,-2.5) P20(8.5,-2.5) P21(9.5,-2.5) P22(10.5,-2.5) R1(-10.5,-3.5) R2(-9.5,-3.5) R3(-8.5,-3.5) R4(-7.5,-3.5) R5(-6.5,-3.5) R6(-5.5,-3.5) R7(-4.5,-3.5) R8(-3.5,-3.5) R9(-2.5,-3.5) R10(-1.5,-3.5) R11(-0.5,-3.5) R12(0.5,-3.5) R13(1.5,-3.5) R14(2.5,-3.5) R15(3.5,-3.5) R16(4.5,-3.5) R17(5.5,-3.5) R18(6.5,-3.5) R19(7.5,-3.5) R20(8.5,-3.5) R21(9.5,-3.5) R22(10.5,-3.5) T1(-10.5,-4.5) T2(-9.5,-4.5) T3(-8.5,-4.5) T4(-7.5,-4.5) T5(-6.5,-4.5) T6(-5.5,-4.5) T7(-4.5,-4.5) T8(-3.5,-4.5) T9(-2.5,-4.5) T10(-1.5,-4.5) T11(-0.5,-4.5) T12(0.5,-4.5) T13(1.5,-4.5) T14(2.5,-4.5) T15(3.5,-4.5) T16(4.5,-4.5) T17(5.5,-4.5) T18(6.5,-4.5) T19(7.5,-4.5) T20(8.5,-4.5) T21(9.5,-4.5) T22(10.5,-4.5) U1(-10.5,-5.5) U2(-9.5,-5.5) U3(-8.5,-5.5) U4(-7.5,-5.5) U5(-6.5,-5.5) U6(-5.5,-5.5) U7(-4.5,-5.5) U8(-3.5,-5.5) U9(-2.5,-5.5) U10(-1.5,-5.5) U11(-0.5,-5.5) U12(0.5,-5.5) U13(1.5,-5.5) U14(2.5,-5.5) U15(3.5,-5.5) U16(4.5,-5.5) U17(5.5,-5.5) U18(6.5,-5.5) U19(7.5,-5.5) U20(8.5,-5.5) U21(9.5,-5.5) U22(10.5,-5.5) V1(-10.5,-6.5) V2(-9.5,-6.5) V3(-8.5,-6.5) V4(-7.5,-6.5) V5(-6.5,-6.5) V6(-5.5,-6.5) V7(-4.5,-6.5) V8(-3.5,-6.5) V9(-2.5,-6.5) V10(-1.5,-6.5) V11(-0.5,-6.5) V12(0.5,-6.5) V13(1.5,-6.5) V14(2.5,-6.5) V15(3.5,-6.5) V16(4.5,-6.5) V17(5.5,-6.5) V18(6.5,-6.5) V19(7.5,-6.5) V20(8.5,-6.5) V21(9.5,-6.5) V22(10.5,-6.5) W1(-10.5,-7.5) W2(-9.5,-7.5) W3(-8.5,-7.5) W4(-7.5,-7.5) W5(-6.5,-7.5) W6(-5.5,-7.5) W7(-4.5,-7.5) W8(-3.5,-7.5) W9(-2.5,-7.5) W10(-1.5,-7.5) W11(-0.5,-7.5) W12(0.5,-7.5) W13(1.5,-7.5) W14(2.5,-7.5) W15(3.5,-7.5) W16(4.5,-7.5) W17(5.5,-7.5) W18(6.5,-7.5) W19(7.5,-7.5) W20(8.5,-7.5) W21(9.5,-7.5) W22(10.5,-7.5) Y1(-10.5,-8.5) Y2(-9.5,-8.5) Y3(-8.5,-8.5) Y4(-7.5,-8.5) Y5(-6.5,-8.5) Y6(-5.5,-8.5) Y7(-4.5,-8.5) Y8(-3.5,-8.5) Y9(-2.5,-8.5) Y10(-1.5,-8.5) Y11(-0.5,-8.5) Y12(0.5,-8.5) Y13(1.5,-8.5) Y14(2.5,-8.5) Y15(3.5,-8.5) Y16(4.5,-8.5) Y17(5.5,-8.5) Y18(6.5,-8.5) Y19(7.5,-8.5) Y20(8.5,-8.5) Y21(9.5,-8.5) Y22(10.5,-8.5)
  silkscreen extent -11.8,-11.6 11.6,11.8
IND_LQH3NPN2R2MJRL [mm]
  rect 0.8x2.7 smd mask+0: 1(-1.1,0) 2(1.1,0)
  silkscreen extent -1.5,-1.67 1.5,1.67
LED_0603_1608Metric [mm]
  rrect25% 0.875x0.95 smd mask+0: 1(-0.787,0) 2(0.787,0)
  silkscreen extent -1.49,-0.73 0.8,0.73
logo25mm [mm]
  silkscreen extent -12.72,-2.94 12.75,2.92
MountingHole_3.2mm_M3_ISO7380_Pad [mm]
  round 5.7 hole 3.2 paste-2539.97 mask+0: 1(0,0)
PinHeader_1x02_P2.54mm_Vertical [mm]
  rect 1.7x1.7 hole 1 paste-2539.97 mask+0: 1(0,0)
  rrect100% 1.7x1.7 hole 1 paste-2539.97 mask+0: 2(0,-2.54)
  silkscreen extent -1.33,-3.87 1.33,1.33
R_0402_1005Metric#1 [mm]
  rrect25% 0.54x0.64 smd mask+0: 1(-0.51,0) 2(0.51,0)
  silkscreen extent -0.15,-0.38 0.15,0.38
R_0402_1005Metric#2 [mm]
  rrect25% 0.54x0.64 smd mask+0: 1(0.51,0) 2(-0.51,0)
  silkscreen extent -0.15,-0.38 0.15,0.38
SAMTEC_TFM-120-02-S-D-A [mm]
  rect 0.74x2.92 smd mask+0: 1(12.065,1.715) 2(12.065,-1.715) 3(10.795,1.715) 4(10.795,-1.715) 5(9.525,1.715) 6(9.525,-1.715) 7(8.255,1.715) 8(8.255,-1.715) 9(6.985,1.715) 10(6.985,-1.715) 11(5.715,1.715) 12(5.715,-1.715) 13(4.445,1.715) 14(4.445,-1.715) 15(3.175,1.715) 16(3.175,-1.715) 17(1.905,1.715) 18(1.905,-1.715) 19(0.635,1.715) 20(0.635,-1.715) 21(-0.635,1.715) 22(-0.635,-1.715) 23(-1.905,1.715) 24(-1.905,-1.715) 25(-3.175,1.715) 26(-3.175,-1.715) 27(-4.445,1.715) 28(-4.445,-1.715) 29(-5.715,1.715) 30(-5.715,-1.715) 31(-6.985,1.715) 32(-6.985,-1.715) 33(-8.255,1.715) 34(-8.255,-1.715) 35(-9.525,1.715) 36(-9.525,-1.715) 37(-10.795,1.715) 38(-10.795,-1.715) 39(-12.065,1.715) 40(-12.065,-1.715)
  round 1.42 hole 1.42 paste-2539.97 mask+0: Un1(13.655,0) Un2(-13.655,0)
  silkscreen extent -14.29,-2.86 15.29,2.86
SOT-23-5 [mm]
  rrect25% 1.325x0.6 smd mask+0: 1(-1.138,0.95) 2(-1.138,0) 3(-1.138,-0.95) 4(1.138,-0.95) 5(1.138,0.95)
  silkscreen extent -1.8,-1.56 0.8,1.56
WSON-8-1EP_6x5mm_P1.27mm_EP3.4x4mm [mm]
  rrect25% 0.775x0.5 smd mask+0: 1(-2.662,1.905) 2(-2.662,0.635) 3(-2.662,-0.635) 4(-2.662,-1.905) 5(2.662,-1.905) 6(2.662,-0.635) 7(2.662,0.635) 8(2.662,1.905)
  rect 3.4x4 smd paste-4 mask+0: 9(0,0)
  rrect18% 1.37x1.61 on Top Paste mask-1.61: Un1(-0.85,1) Un2(-0.85,-1) Un3(0.85,1) Un4(0.85,-1)
  silkscreen extent -3,-2.61 3,2.61

## Part data
C1 C3 C5 C7 C8 C9 C10 C11 C12 C13 C25 C26 C27 C28 C35 C36 C37 C38 C39: library part C_Small, JLCPCB=C162420
C2 C4 C6: library part C_Small, JLCPCB=C105505
C14 C15 C16 C17 C18 C19 C20 C21 C22 C29 C30 C31 C32 C40 C41 C42 C43 C44 C45 C46: library part C_Small, JLCPCB=C106255
C23 C24: library part C_Small, JLCPCB=C385907
C33 C34: library part C_Small, JLCPCB=C268006
D1: library part LED, JLCPCB=C89814
D2: library part LED, JLCPCB=C601673
D3 D4 D5: library part LED, JLCPCB=C40378
J2 J3 J4: JLCPCB=C2881867
L1 L2 L3: library part L_Small
R1: library part R_Small, JLCPCB=C131362
R2 R5: library part R_Small, JLCPCB=C409681
R3: library part R_Small, JLCPCB=C323683
R4: library part R_Small, JLCPCB=C323663
R6: library part R_Small, JLCPCB=C416388
R7 R8 R9 R10 R15 R16 R17: library part R_Small, JLCPCB=C3017492
R11: library part R_Small, JLCPCB=C881192
R12 R13 R14 R19: library part R_Small, JLCPCB=C328298
R18: library part R_Small, JLCPCB=C471762
U1: library part XC7A35T-FGG484
U2: library part NCP1529A, JLCPCB=C87122
U3 U4: library part NCP1529A, JLCPCB=C23902
U5: library part MX25R3235FM2xx0, JLCPCB=C2802709
U6: library part logo25mm, Sheetfile=som_fpga.kicad_sch
X1: library part SG-5032CCN, JLCPCB=C390488

## Via types
v1: diameter 0.6, hole 0.3, F.Cu to B.Cu, tented both sides, 250 vias

## Nets (pads, with @x,y where several pads share a name; then routed paths per layer and width w, separated by ;. In a path a pad name is that pad's centre, name@x,y a point inside that pad or via, vN(x,y) a via of type N, cw(c..) or ccw(c..) an arc to the next point about the centre after c; other vN are vias at no path point)
+1V0: C6.1 C33.1 C34.1 C35.1 C36.1 C37.1 C38.1 C39.1 C40.1 C41.1 C42.1 C43.1 L3.2 R5.1 U1.H8 U1.H10 U1.J7 U1.J9 U1.J11 U1.K8 U1.L7 U1.L11 U1.M8 U1.N7 U1.N11 U1.P8 U1.P10 U1.R7 U1.R9 U1.T8 U1.T10 | length 26.3
  F.Cu w0.127: U1.T10@137.43,31.43 U1.R9@138.43,32.43 ; U1.T8@137.43,33.43 v1(137.755,33.105) U1.R9@138.43,32.43 ; U1.R7@138.43,34.43 138.43,34.453 v1(138.713,34.736) ; U1.P8@139.43,33.43 139.586,33.43 v1(139.687,33.532) ; U1.N7@140.43,34.43 v1(140.755,34.755)
  F.Cu w0.2: L3.2@113.094,31.711 114.394,31.711 C6.1@116.144,33.461 117.169,32.436 119.609,32.436 R5.1@119.794,32.621 119.829,32.586 C33.1@122.881,32.586 ; C33.1@122.881,32.712 C33.1@122.881,32.586 ; v1(123.294,31.476) 122.881,31.889 C33.1@122.881,32.586 ; U1.P10@139.43,31.43 139.43,31.44 v1(139.735,31.746) ; v1(140.36,30.61) 140.43,30.54 U1.N11@140.43,30.43 ; U1.M8@141.43,33.43 141.44,33.43 v1(141.56,33.31) ; U1.L7@142.43,34.43 v1(142.755,34.755) ; U1.K8@143.43,33.43 143.49,33.43 v1(143.54,33.38) 144.43,32.49 U1.J9@144.43,32.43 ; v1(144.105,30.755) U1.J11@144.43,30.43 ; v1(144.236,34.153) 144.43,34.348 U1.J7@144.43,34.43 ; U1.H8@145.3,33.43 U1.H8@145.43,33.43 ; v1(145.31,31.27) 145.43,31.39 U1.H10@145.43,31.43
  B.Cu w0.2: C39.1@134.38,36.87 134.405,36.87 137.755,33.52 v1(137.755,33.105) ; C43.1@144.89,33.84 145.143,33.84 v1(145.488,33.495)
  other v1: 142.423,30.448 124.2,32.83 124.78,33.5 121.8,33.93 122.7,33.93 123.6,33.93
+1V8: C4.1 C24.1 C25.1 C26.1 C27.1 C28.1 C29.1 C30.1 C31.1 C32.1 L2.2 R4.1 U1.E12 U1.H12 U1.K10 U1.K12 U1.M12 U1.P12 U1.R11 U2.1 | length 73.4
  F.Cu w0.127: U1.P12@139.43,29.43 139.93,29.93 140.93,29.93 U1.M12@141.43,29.43 U1.M12@141.452,29.43 ; v1(143.105,31.755) U1.K10@143.43,31.43 ; v1(145.06,29.74) 145.12,29.74 U1.H12@145.43,29.43 ; v1(148.046,29.762) 148.378,29.43 U1.E12@148.43,29.43
  F.Cu w0.2: L2.2@113.219,23.836 114.369,23.836 C4.1@116.169,25.636 ; U2.1@116.313,39.496 U2.1@115.964,39.496 115.615,39.496 114.949,38.83 111.7,38.83 110.9,38.03 110.9,27.73 112.994,25.636 C4.1@116.169,25.636 ; C24.1@123.007,25.061 120.204,25.061 R4.1@119.919,25.346 119.184,24.611 117.194,24.611 C4.1@116.169,25.636 ; v1(127.29,26.1) 125.82,24.63 125.82,21.149 126.724,20.245 127.676,20.245 128.89,21.459 v1(128.89,25.84) ; U1.R11@138.43,30.43 138.43,30.4 v1(138.6,30.23) 139.01,29.82 139.01,29.76 139.34,29.43 U1.P12@139.43,29.43 ; v1@143.105,29.755 U1.K12@143.43,29.43
  B.Cu w0.127: v1(143.105,29.755) v1(143.105,31.755) ; C28.1@144.92,38.8 145.29,38.43 147,38.43 147.224,38.207 147.224,37.417 147.22,37.413 147.22,34.71 147.789,34.142 147.979,34.142 147.979,32.558 C26.1@146.99,31.57 146.99,30.818 v1(148.046,29.762)
  B.Cu w0.2: v1(138.6,30.23) 139.131,30.23 140.111,31.21 140.609,31.21 140.96,30.859 140.96,30.755 142.005,29.71 C31.1@142.82,29.71 143.06,29.71 v1(143.105,29.755)
  other v1: 124.8,25.53 126,25.53
+3V3: C2.1 C7.1 C8.1 C9.1 C10.1 C11.1 C12.1 C13.1 C14.1 C15.1 C16.1 C17.1 C18.1 C19.1 C20.1 C21.1 C22.1 C23.1 J1.1 J2.12 J2.39 J2.40 J3.39 J3.40 J4.39 J4.40 L1.2 R1.1 R7.2 R9.2 R10.2 R11.2 R15.1 R16.1 R17.1 U1.A17 U1.AA7 U1.AA17 U1.AB4 U1.AB14 U1.B14 U1.C1 U1.C21 U1.D18 U1.E15 U1.F2 U1.F12 U1.F22 U1.G19 U1.H6 U1.H16 U1.J3 U1.J13 U1.K20 U1.L17 U1.M4 U1.M14 U1.N1 U1.N21 U1.P18 U1.R5 U1.R15 U1.T2 U1.T12 U1.T22 U1.U11 U1.U19 U1.V6 U1.V16 U1.W3 U1.W13 U1.Y10 U1.Y20 U5.8 X1.1 X1.4 | length 130
  F.Cu w0.127: v1(131.2,37.53) 131.3,37.43 U1.AB4@131.43,37.43 ; 133.75,31.08 133.937,30.894 ; v1(134.2,38.63) 134.4,38.43 U1.W3@134.43,38.43 ; U1.U11@136.43,30.43 136.6,30.43 v1(137.3,29.73) 137.3,29.56 U1.T12@137.43,29.43 ; U1.T2@137.43,39.43 137.5,39.43 v1(137.6,39.53) ; v1(138.16,26.261) 138.33,26.43 U1.R15@138.43,26.43 ; U1.R5@138.43,36.43 138.893,36.893 140.894,36.893 U1.M4@141.43,37.43 141.43,37.505 v1(141.717,37.792) ; v1(144.162,38.076) 144.162,38.162 U1.J3@144.43,38.43 ; v1(145.3,35.53) 145.4,35.43 U1.H6@145.43,35.43 ; v1(147.41,17.72) 147.43,17.74 U1.F22@147.43,19.43 U1.F22@147.441,19.43 ; v1(150.01,20.85) U1.C21@150.43,20.43 ; U1.A17@152.43,24.43 153.437,24.43 v1(153.5,24.493) ; X1.4@156.55,22.23 X1.1@158.25,22.23 ; C18.1@157.07,29.58 157.07,30.7 R11.2@157.1,30.73 v1(157.4,30.73) ; v1(158,21.43) 158.25,21.68 X1.1@158.25,22.23 ; C15.1@159.9,23.53 159.55,23.53 X1.1@158.25,22.23
  F.Cu w0.2: L1.2@113.102,39.646 114.252,39.646 C2.1@116.151,41.546 117.176,42.571 120.714,42.571 ; R1.1@119.839,41.506 119.839,41.696 120.714,42.571 ; C23.1@123.001,41.321 121.751,42.571 120.714,42.571 ; v1(124.014,40.211) v1@124.014,40.309 ; v1(131.2,27.23) 131.4,27.43 U1.AB14@131.43,27.43 ; v1(132.2,24.63) 132.4,24.43 U1.AA17@132.43,24.43 ; U1.AA7@132.43,34.43 132.43,34.44 v1(132.49,34.5) 132.92,34.93 134.93,34.93 U1.V6@135.43,35.43 ; U1.Y20@133.43,21.43 133.5,21.43 v1(133.7,21.63) ; U1.Y10@133.43,31.43 133.43,31.4 v1(133.5,31.33) 133.75,31.08 133.93,30.9 133.93,28.93 U1.W13@134.43,28.43 134.42,28.43 U1.W13@134.32,28.33 ; v1(134.43,14.01) 134.45,14.03 C17.1@134.45,14.44 ; U1.V16@135.43,25.43 135.905,24.955 v1(135.905,24.944) ; U5.8@136.11,16.49 136.11,17.54 v1(137.4,18.83) 137.43,18.86 U1.T22@137.43,19.43 ; U1.U19@136.43,22.43 136.5,22.43 v1(136.6,22.53) ; U1.P18@139.43,23.419 U1.P18@139.43,23.43 139.761,23.099 v1(139.814,23.099) ; v1(140.3,20.53) 140.4,20.43 U1.N21@140.43,20.43 ; v1(140.41,40.95) 140.43,40.93 U1.N1@140.43,40.43 ; U1.M14@141.43,27.43 141.48,27.43 v1(141.63,27.28) ; U1.L17@142.43,24.43 v1(142.755,24.755) ; U1.K20@143.43,21.43 143.43,21.389 143.889,20.93 144.91,20.93 v1@144.92,20.94 ; U1.J13@144.43,28.43 144.898,27.962 v1(144.898,27.95) ; v1(145.27,25.22) 145.43,25.38 U1.H16@145.43,25.43 ; U1.G19@146.43,22.43 146.5,22.43 v1(146.6,22.33) ; v1(147.105,29.105) U1.F12@147.43,29.43 ; v1(147.21,39.67) 147.21,39.65 U1.F2@147.43,39.43 ; U1.E15@148.43,26.43 148.43,26.44 v1(148.64,26.65) ; v1@150.105,40.105 U1.C1@150.43,40.43 ; v1(167.755,39.793) 169.23,38.318 169.23,23.46 v1(167.81,22.04)
  F.Cu w0.4: C23.1@123.001,41.321 v1@124.014,40.309
  In1.Cu w0.254: J1.1@127.127,18.923 130.302,18.923 130.683,18.542 132.842,18.542 133.13,18.83 v1(137.4,18.83)
  B.Cu w0.127: v1(138.16,26.261) C9.1@140.04,24.381 ; v1(152.25,44.38) 152.492,44.623 J3.40@152.492,46.625
  B.Cu w0.2: J4.39@128.362,4.9 v1(128.362,10.193) ; C20.1@131.5,25.2 132.07,24.63 v1(132.2,24.63) ; C8.1@131.69,28.4 131.69,27.72 v1(131.2,27.23) 134.11,30.14 R9.2@135.93,30.14 ; v1(135.905,24.944) 135.92,24.928 C12.1@135.92,24.42 ; v1(136.56,16.027) 136.68,15.907 R15.1@136.68,14.84 137.7,13.82 R17.1@137.94,13.82 138.95,14.83 R16.1@139.19,14.83 C21.1@140.35,14.83 ; R7.2@136.7,32.62 136.7,30.91 R9.2@135.93,30.14 ; v1(137.3,29.73) 136.89,30.14 R9.2@135.93,30.14 ; v1(138.16,26.261) 138.98,27.08 139.42,27.08 R10.2@141.05,28.71 ; C9.1@140.04,24.38 C9.1@140.05,24.37 ; v1(147.105,29.105) 147.105,28.185 v1(148.64,26.65) ; v1(149.43,23.43) 149.91,23.91 C14.1@149.98,23.91 ; C19.1@149.83,40.02 150.02,40.02 v1(150.105,40.105) 151.081,39.13 C13.1@151.38,39.13 ; v1(152.25,44.38) 153.65,42.98 C11.1@153.65,42.68 ; J2.39@162.95,40.04 163.197,39.793 J2.39@164.325,39.793 v1(167.755,39.793) ; J2.12@167.755,22.013 167.782,22.013 v1(167.81,22.04)
  B.Cu w0.254: J3.40@152.492,46.625 J3.39@152.492,50.055
  other v1: 144.93,20.94 151.51,27.71 128.4,32.13 129.8,32.13 128.7,35.13 129.5,35.13 128.4,36.73 128.4,37.53 128.4,38.33 128.4,39.13 128.4,39.93 163.72,40.13